# EAGLE board wagband_schematic (EAGLE 7.5.0)

Size 100 x 80 mm. Coordinates in mm from the lower left corner, seen from the top.
Outline: 0,0 100,0 100,80 0,80 0,0
Copper layers (1*16): Top 0.035mm / dielectric 1.5mm / Bottom 0.035mm
Design rules "default": minimum track width 10mil, minimum drill 24mil, track to track 8mil, track to pad 8mil, pad to pad 8mil, via to via 8mil, smd to smd 8mil, copper to edge 40mil, drill to drill 8mil, minimum pad ring 10mil, minimum via ring 8mil, stop-mask expansion 4mil, vias tented up to drill 0mil, thermal gap 10mil

## Footprints (pad centres in the part's own frame; a part is rotated, then mirrored left to right if it is on the bottom)
JST-PH-2-THM-RA = drill 0.8 pad 1.422: 1 1,0; 2 -1,0
C025-024X044 = drill 0.813 octagon: 1 -1.27,0; 2 1.27,0
2X04 = drill 1.016 octagon: 1 -3.81,-1.27; 2 -3.81,1.27; 3 -1.27,-1.27; 4 -1.27,1.27; 5 1.27,-1.27; 6 1.27,1.27; 7 3.81,-1.27; 8 3.81,1.27
FE08 = drill 0.813 long: 1 -8.89,0; 2 -6.35,0; 3 -3.81,0; 4 -1.27,0; 5 1.27,0; 6 3.81,0; 7 6.35,0; 8 8.89,0
SOT230P700X180-4N = smd 1.626 x 0.889: 1 -3.2,2.311; 2 -3.2,0; 3 -3.2,-2.311 | smd 1.626 x 3.175: 4 3.2,0
TEENSY3-DIL+4 = drill 0.965: 0 -7.62,13.97; 1 -7.62,11.43; 2 -7.62,8.89; 3 -7.62,6.35; 3.3V 7.62,11.43; 4 -7.62,3.81; 5 -7.62,1.27; 6 -7.62,-1.27; 7 -7.62,-3.81; 8 -7.62,-6.35; 9 -7.62,-8.89; 10 -7.62,-11.43; 11 -7.62,-13.97; 12 -7.62,-16.51; 13 7.62,-16.51; 14/A0 7.62,-13.97; 15/A1 7.62,-11.43; 16/A2 7.62,-8.89; 17/A3 7.62,-6.35; 18/A4 7.62,-3.81; 19/A5 7.62,-1.27; 20/A6 7.62,1.27; 21/A7 7.62,3.81; 22/A8 7.62,6.35; 23/A9 7.62,8.89; A10 5.08,6.35; A11 5.08,3.81; AGND 7.62,13.97; AREF 5.08,8.89; GND -7.62,16.51; VIN 7.62,16.51; VUSB 5.08,13.97
EASYVR_3_0 = drill 0.8 square: P$1 -11.43,25.4; P$2 -11.43,22.86; P$3 -11.43,20.32; P$4 -11.43,17.78; P$5 -11.43,15.24; P$6 -11.43,12.7; P$7 -11.43,-7.62; P$8 -11.43,-10.16; P$9 -11.43,-12.7; P$10 -11.43,-15.24; P$11 -11.43,-17.78; P$12 -11.43,-20.32; P$13 -11.43,-22.86; P$14 -11.43,-25.4; P$15 11.43,-25.4; P$16 11.43,-22.86; P$17 11.43,-20.32; P$18 11.43,-17.78; P$19 11.43,-15.24; P$20 11.43,-12.7; P$21 11.43,-10.16; P$22 11.43,-7.62; P$23 11.43,12.7; P$24 11.43,15.24; P$25 11.43,17.78; P$26 11.43,20.32; P$27 11.43,22.86; P$28 11.43,25.4

## Placement (x,y rotation side)
BATTERY  [JST-PH-2-THM-RA]  25.4,19.05 180 top
C1  105  [C025-024X044]  25.4,22.86 0 top
C2  105  [C025-024X044]  25.4,34.29 0 top
ESP8266_HDR  [2X04]  39.37,15.24 0 top
MPU6050  [FE08]  25.4,49.53 0 top
U2  TLV1117-33CDCY  [SOT230P700X180-4N]  25.4,27.94 0 top
U$1  TEENSY_3.1_DIL+4  [TEENSY3-DIL+4]  24.13,30.48 180 top
U$2  EASYVR_3_0  [EASYVR_3_0]  -40.64,30.48 0 top  (outside the outline)

## Library data of the parts
BATTERY = adafruit
C1 C2 = rcl
ESP8266_HDR = pinhead
MPU6050 = con-lsta; OC_FARNELL: unknown; OC_NEWARK: unknown
U2 = Texas Instruments_By_element14_Batch_1; MPN: TLV1117-33CDCY; OC_FARNELL: 1494942; OC_NEWARK: 67K8520; PACKAGE: SOT-223-3; SUPPLIER: TEXAS INSTRUMENTS
U$1 = Teensy_3_and_LC_Series_Boards_v1.1
U$2 = mqp_custom_parts

## Nets
3.3V: U$1.3.3V
5V: U$2.P$16
AGND: U$1.AGND
AREF: U$1.AREF
GND: BATTERY.1 C1.2 C2.2 ESP8266_HDR.2 MPU6050.2 U2.1 U$1.GND U$2.P$14 U$2.P$15
N$1: U$1.7 U$2.P$20
N$2: U$1.8 U$2.P$19
N$4: MPU6050.4 U$1.18/A4
N$5: U$1.3 U$2.P$8
N$7: ESP8266_HDR.1 U$1.0
N$8: MPU6050.8 U$1.17/A3
N$17: MPU6050.3 U$1.19/A5
N$19: ESP8266_HDR.8 U$1.1
N$21: ESP8266_HDR.5 U$1.2
VCC: BATTERY.2 C1.1 C2.1 ESP8266_HDR.3 ESP8266_HDR.7 MPU6050.1 U2.3 U2.4 U$1.VIN U$2.P$13
VDD: U$2.P$23
VUSB: U$1.VUSB

## Tracks (layer width: path | path; a pad name or v marks a point on that pad's centre or on a via)
GND  (8 unrouted)
N$1  (1 unrouted)
N$2  (1 unrouted)
N$4  (1 unrouted)
N$5  (1 unrouted)
N$7  (1 unrouted)
N$8  (1 unrouted)
N$17  (1 unrouted)
N$19  (1 unrouted)
N$21  (1 unrouted)
VCC  (9 unrouted)